# EAGLE board PressureModule (EAGLE 7.6.0)
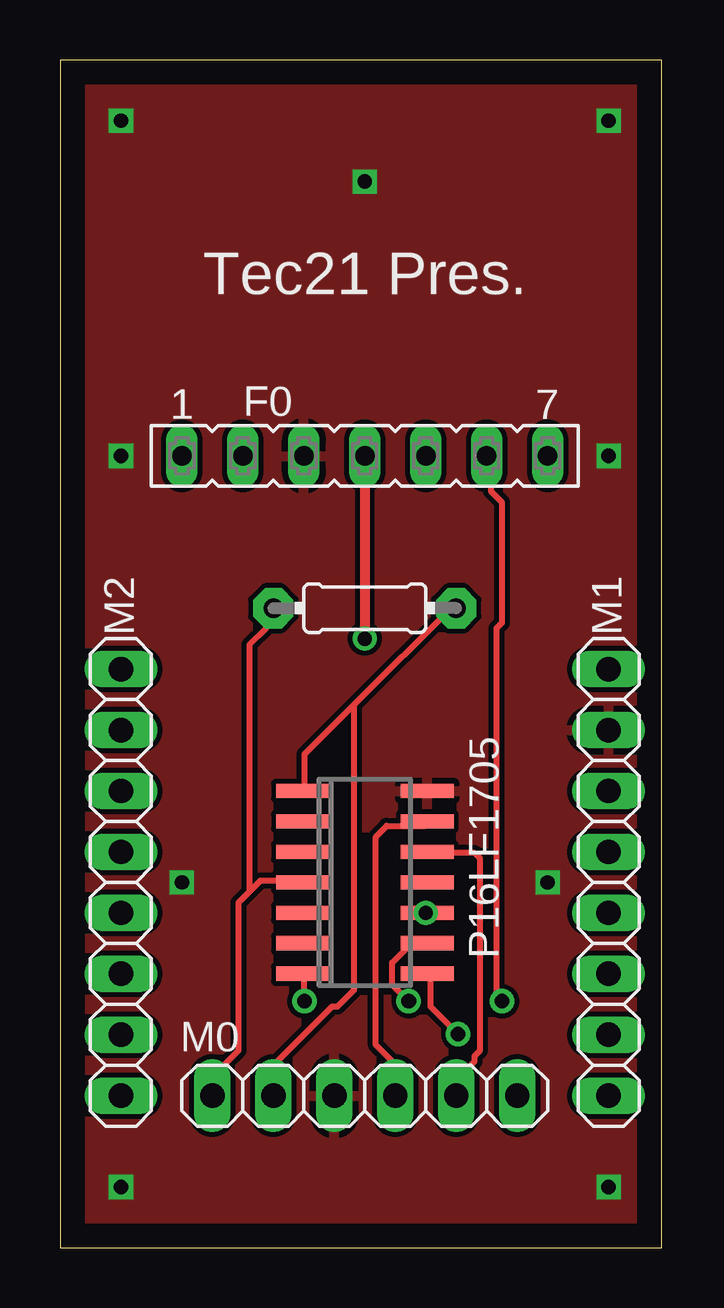
[diagram p0: board, top side]
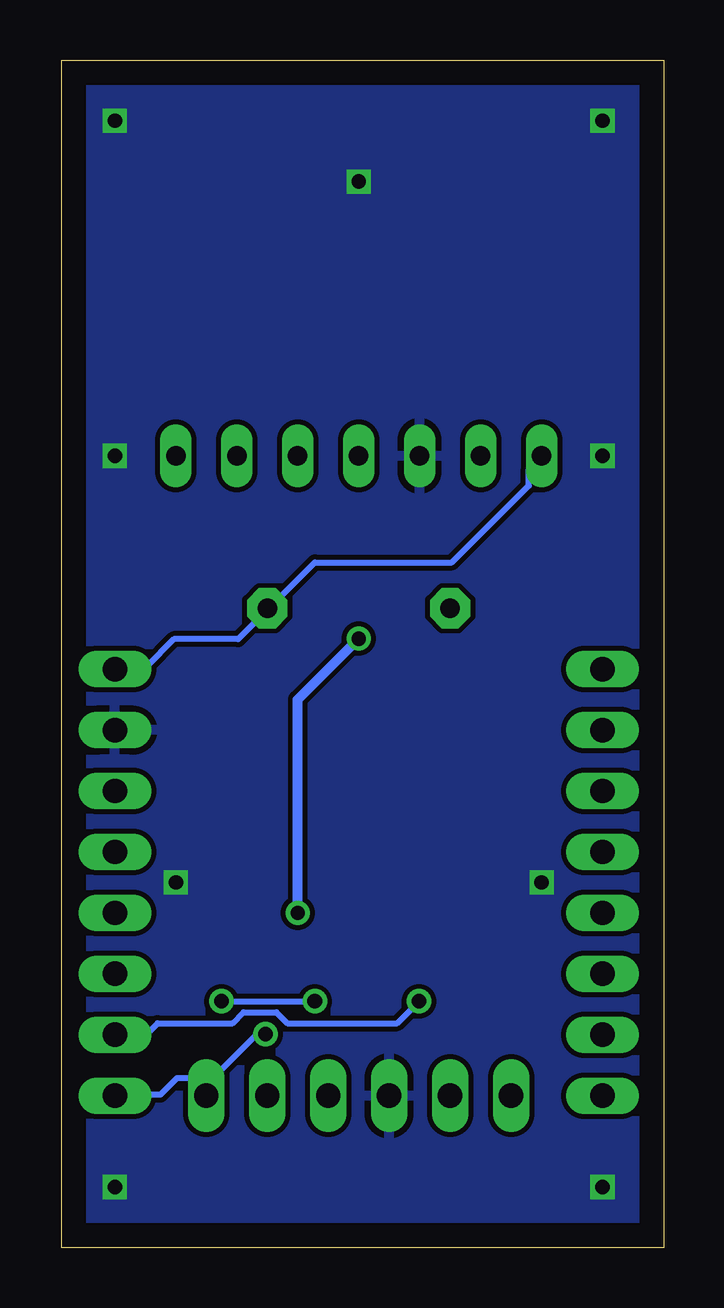
[diagram p1: board, bottom side, seen from below]

Size 25.07 x 49.52 mm. Coordinates in mm from the lower left corner, seen from the top.
Outline: 0,0 25.07,0 25.07,49.52 0,49.52 0,0
Copper layers (1*16): Top 0.035mm / dielectric 1.5mm / Bottom 0.035mm
Design rules "default": minimum track width 10mil, minimum drill 24mil, track to track 8mil, track to pad 8mil, pad to pad 8mil, via to via 8mil, smd to smd 8mil, copper to edge 40mil, drill to drill 8mil, minimum pad ring 10mil, minimum via ring 8mil, stop-mask expansion 4mil, vias tented up to drill 0mil, thermal gap 10mil

## Footprints (pad centres in the part's own frame; a part is rotated, then mirrored left to right if it is on the bottom)
0204/7 = drill 0.813 pad 1.676 octagon: 1 -3.81,0; 2 3.81,0
FE07 = drill 0.813 long: 1 -7.62,0; 2 -5.08,0; 3 -2.54,0; 4 0,0; 5 2.54,0; 6 5.08,0; 7 7.62,0
1X06 = drill 1.016 long: 1 -6.35,0; 2 -3.81,0; 3 -1.27,0; 4 1.27,0; 5 3.81,0; 6 6.35,0
1X08 = drill 1.016 long: 1 -8.89,0; 2 -6.35,0; 3 -3.81,0; 4 -1.27,0; 5 1.27,0; 6 3.81,0; 7 6.35,0; 8 8.89,0
SO-14 = smd 0.6 x 2.2: 1 -3.81,-2.6; 2 -2.54,-2.6; 3 -1.27,-2.6; 4 0,-2.6; 5 1.27,-2.6; 6 2.54,-2.6; 7 3.81,-2.6; 8 3.81,2.6; 9 2.54,2.6; 10 1.27,2.6; 11 0,2.6; 12 -1.27,2.6; 13 -2.54,2.6; 14 -3.81,2.6

## Placement (x,y rotation side)
10K  10k  [0204/7]  12.7,26.67 0 top
F0  [FE07]  12.7,33.02 0 top
M0  [1X06]  12.7,6.35 0 top
M1  [1X08]  22.86,15.24 270 top
M2  [1X08]  2.54,15.24 270 top
P16LF1705  PIC16F676SL  [SO-14]  12.7,15.24 270 top

## Library data of the parts
10K = adafruit
F0 = con-lsta
M0 M1 M2 = pinhead
P16LF1705 = microchip; MF: MICROCHIP; MPN: PIC16F676-I/SL; OC_FARNELL: 9760520; OC_NEWARK: 92C4557

## Nets
CCL: M1.7 P16LF1705.7
CDA: M1.8 P16LF1705.8
GND: F0.3 M0.3 M1.2 P16LF1705.14
LCL: F0.6 P16LF1705.9
LDA: F0.4 P16LF1705.10
MCLR: 10K.1 M0.1 P16LF1705.4
N$8: F0.2
PGC: M0.5 P16LF1705.12
PGD: M0.4 P16LF1705.13
VDD: 10K.2 F0.1 M0.2 M1.1 P16LF1705.1

## Tracks (layer width: path | path; a pad name or v marks a point on that pad's centre or on a via)
CCL  (via drill 0.61)
  Top 0.254: v10.18,10.29 10.18,11.43 P16LF1705.7
  Bottom 0.254: v10.18,10.29 11.1,9.37 15.67,9.37 16.13,9.83 17.5,9.83 17.96,9.37 21.08,9.37 21.54,8.91 22.68,8.91 M1.7
CDA  (via drill 0.61)
  Top 0.254: v16.59,8.91 15.44,10.06 15.44,11.43 P16LF1705.8
  Bottom 0.254: v16.59,8.91 16.94,8.91 18.77,7.09 20.27,7.09 20.95,6.4 21.41,6.4 M1.8
GND  (via drill 0.6)
  other vias: 2.54,46.99 22.86,46.99 22.86,33.02 2.54,33.02 12.7,44.45 5.08,15.24 20.32,15.24 2.54,2.54 22.86,2.54
  pour Top: -1.27,50.8 26.67,50.8 26.67,-1.27 -1.27,-1.27
  pour Bottom: -1.27,50.8 26.67,50.8 26.67,-1.27 -1.27,-1.27
LCL  (via drill 0.61)
  Top 0.254: v14.53,10.29 13.84,10.97 13.84,11.89 14.53,12.57 15.21,12.57 P16LF1705.9 | v18.41,10.29 18.19,10.52 18.19,25.83 18.41,26.06 18.41,31.09 17.96,31.55 17.96,32.92 F0.6
  Bottom 0.254: v18.41,10.29 v14.53,10.29
LDA  (via drill 0.6)
  Top 0.254: P16LF1705.10 15.44,13.95 v15.24,13.97
  Top 0.406: F0.4 v12.7,25.4
  Bottom 0.406: v15.24,13.97 15.24,22.86 v12.7,25.4
MCLR
  Top 0.254: 7.9,14.86 7.44,14.4 7.44,8.23 6.53,7.32 6.53,6.4 M0.1 | 7.9,14.86 8.36,15.32 9.96,15.32 P16LF1705.4 | 7.9,14.86 7.9,25.15 8.59,25.83 8.59,26.29 8.81,26.52 10K.1
PGC
  Top 0.254: P16LF1705.12 15.44,16.46 17.27,16.46 17.5,16.23 17.5,8.23 17.27,8 17.27,7.77 16.59,7.09 16.59,6.4 M0.5
PGD
  Top 0.254: P16LF1705.13 15.21,17.6 13.61,17.6 13.16,17.14 13.16,8.46 14.07,7.54 14.07,6.4 M0.4
VDD
  Top 0.254: 12.24,22.63 16.36,26.75 10K.2 | 12.24,22.63 10.18,20.57 10.18,19.2 P16LF1705.1 | 12.24,22.63 12.24,10.74 11.56,10.06 11.33,10.06 9.04,7.77 9.04,6.4 M0.2
  Bottom 0.254: F0.1 5.16,32.92 5.61,32.46 5.61,31.77 8.81,28.57 14.53,28.57 16.36,26.75 10K.2 16.59,26.52 17.73,25.38 20.4,25.38 21.54,24.23 22.68,24.23 M1.1

## Text on the board
tPlace: Tec21 Pres.